# Altium PCB MiniPCB.PcbDoc (part 2 of 2)
Units mil, origin at the board's own origin, x right, y up, seen from the top; angles counter-clockwise.
Board outline 669.97 x 951.03 mil, 4 copper layers (Top Layer, GND, PWR, Bottom Layer), stack 30.2 mil thick; 100 components, 54 nets, 382 pads, 151 vias.
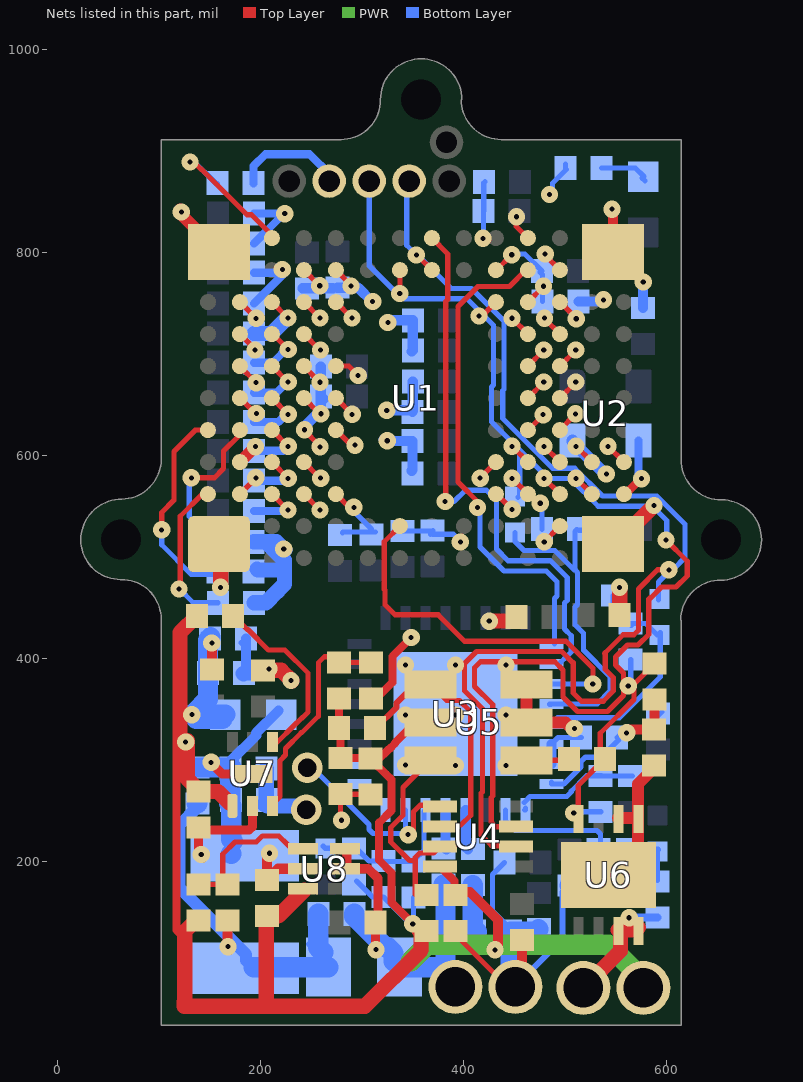
[diagram p4: the nets of this part, all layers, seen from the top]

## Via types
v1: diameter 17, hole 5, Top Layer to GND, tented both sides, 41 vias
v2: diameter 17, hole 5, Top Layer to Bottom Layer, tented both sides, 39 vias
v3: diameter 17, hole 5, GND to Bottom Layer, tented bottom, 18 vias
v4: diameter 17, hole 5, Top Layer to GND, tented top, 16 vias
v5: diameter 17, hole 5, GND to Bottom Layer, 11 vias
v6: diameter 17, hole 5, Top Layer to Bottom Layer, tented top, 8 vias
v7: diameter 17, hole 5, PWR to Bottom Layer, tented bottom, 7 vias
v8: diameter 17, hole 5, Top Layer to PWR, 4 vias
v9: diameter 17, hole 5, Top Layer to GND, 3 vias
v10: diameter 17, hole 5, Top Layer to PWR, tented top, 3 vias
v11: diameter 17, hole 5, PWR to Bottom Layer, 1 vias

## Nets (pads, with @x,y where several pads share a name; then routed paths per layer and width w, separated by ;. In a path a pad name is that pad's centre, name@x,y a point inside that pad or via, vN(x,y) a via of type N, cw(c..) or ccw(c..) an arc to the next point about the centre after c; other vN are vias at no path point) (continued)
GND: C1.0 C2.0 C3.0 C4.0 C5.0 C6.0 C7.0 C8.0 C9.0 C10.0 C11.0 C12.0 C13.1 C14.1 C15.1 C16.1 C17.1 C18.1 C19.0 C20.1 C21.1 C22.1 C23.1 C24.1 C25.1 C26.1 C27.1 C28.1 C29.1 C30.1 C31.1 C32.1 C35.1 C36.1 C37.1 C38.0 C39.1 C40.1 C41.1 C42.1 C43.1 C44.1 C45.1 C46.1 C47.0 C48.0 C49.1 C50.1 C51.0 C52.0 C53.0 C54.0 C55.0 C56.1 C57.1 C58.1 C59.1 C60.1 C61.1 C62.0 C63.1 C64.1 J1.1 pad.1@267.72,870.08 pad.3@245.28,251.4 R2.1 R5.0 R11.0 R12.0 R16.1 U1.1-A1 U1.9-A11 U1.10-B3 U1.11-B4 U1.13-B6 U1.14-B7 U1.15-B8 U1.16-B9 U1.19-C3 U1.20-C4 U1.21-C5 U1.22-C6 U1.23-C7 U1.24-C8 U1.25-C9 U1.30-D3 U1.31-D4 U1.32-D5 U1.33-D6 U1.34-D7 U1.35-D8 U1.36-D9 U1.37-D10 U1.41-E3 U1.43-E5 U1.44-E6 U1.45-E7 U1.47-E9 U1.48-E10 U1.68-K3 U1.69-K4 U1.74-K9 U1.79-L3 U1.80-L4 U1.81-L5 U1.82-L6 U1.83-L7 U1.84-L8 U1.85-L9 U1.87-L11 U1.89-M2 U1.90-M3 U1.91-M4 U1.92-M5 U1.93-M6 U1.94-M7 U1.95-M8 U1.96-M9 U1.97-M10 U1.99-N3 U1.100-N4 U1.106-P1 U1.108-P4 U1.114-P11 U2.2 U3.6 U3.7 U3.33 U4.5 U5.2 U5.3 U7.2 U7.7 U8.2 U8.3 U8.5 | length 4390.7
  Top Layer w5.12: U1.10-B3@179.89,562.01 194.88,577.01 v1@194.88,579.18 ; U1.13-B6@179.89,656.5 195.13,641.26 v1(196.06,641.26) ; U1.14-B7@179.89,687.99 179.89,687.65 v1(195.89,671.65) ; U1.15-B8@179.89,719.49 194.71,704.68 v1(194.71,703.94) ; U1.16-B9@179.89,750.99 v1(195.86,735.02) ; U1.19-C3@211.38,562.01 226.94,546.46 v6(227.16,546.46) ; U1.20-C4@211.38,593.51 v6(227.35,577.54) ; U1.21-C5@211.38,625 v6(227.35,609.03) ; U1.22-C6@211.38,656.5 v6(227.35,640.53) ; U1.24-C8@211.38,719.49 212.22,719.49 v6(227.39,704.33) ; U1.25-C9@211.38,750.99 v6@226.94,735.43 ; U1.23-C7@212.01,687.99 U1.23-C7@211.38,687.99 226.93,672.44 v6(227.39,672.44) ; U1.30-D3@242.88,562.01 v1@258.44,546.46 ; U1.31-D4@242.88,593.51 257.38,579.02 v1@257.38,577.59 ; U1.32-D5@242.88,625 258.44,609.45 v1@258.66,609.45 ; U1.33-D6@242.88,656.5 257.35,642.04 v1@258.81,642.04 ; U1.34-D7@242.88,687.99 242.88,687.83 v1@257.87,672.83 ; U1.35-D8@242.88,719.49 v1@258.44,703.94 ; U1.36-D9@242.88,750.99 v4@258.44,735.44 ; U1.37-D10@242.88,782.48 v1@258.44,766.93 ; U1.41-E3@274.37,562.01 v6@289.93,546.46 ; U1.43-E5@274.37,625 289.17,610.2 v1(293.18,610.2) ; U1.44-E6@274.37,656.5 v1(290.34,640.53) ; U1.47-E9@274.37,750.99 v1@289.93,735.44 ; U1.48-E10@274.37,782.48 v1@289.93,766.93 ; U1.45-E7@275,687.99 U1.45-E7@274.37,687.99 287.01,687.99 v4@298,677 ; C41.1@278.74,266.93 278.74,240.95 v4@279.83,239.86 ; C41.1@283.86,265.75 284.65,266.54 C40.1@308.27,266.54 ; v4(296.22,678.78) 301.99,678.78 v4@297.55,683.22 ; v1@416.29,577.96 U1.69-K4@431.85,593.51 ; v1@416.29,735.44 U1.74-K9@431.85,750.99 ; U1.68-K3@432.08,562.56 v4@447.64,547 ; v1@447.79,577.57 U1.79-L3@463.35,562.01 ; v1@447.79,609.07 U1.80-L4@463.35,593.51 ; v1@447.79,735.05 U1.84-L8@463.35,719.49 ; v1@451.92,835.35 451.92,825.42 U1.87-L11@463.35,813.98 ; U1.81-L5@462.8,624.44 v4@478.36,640 ; U1.82-L6@463.35,656.5 v1@478.91,672.06 ; U1.83-L7@463.35,687.99 v1@478.91,703.55 ; U1.85-L9@463.35,750.99 v1@478.91,766.55 ; v1@477.54,799 478.33,799 v1@480.35,796.99 ; v1@478.9,513.79 478.9,514.56 U1.89-M2@494.85,530.51 ; v1@479.29,577.57 U1.90-M3@494.85,562.01 ; v1@479.29,609.07 U1.91-M4@494.85,593.51 ; v1@479.29,798.04 v1@479.33,798 ; v1@479.8,736.98 479.8,734.54 U1.95-M8@494.85,719.49 ; v1(480.3,798.33) v1@480.35,796.99 ; U1.92-M5@494.69,625.23 v1@510.25,640.79 ; U1.93-M6@494.85,656.5 v1@510.41,672.06 ; U1.94-M7@494.85,687.99 v1@510.41,703.55 ; U1.96-M9@494.85,750.99 511.54,734.31 v1@512.56,734.31 ; U1.97-M10@494.85,782.48 v1@480.35,796.99 ; v1@510.78,577.57 U1.99-N3@526.34,562.01 ; v1@510.78,609.07 U1.100-N4@526.34,593.51 ; v1@542.28,609.07 U1.108-P4@557.84,593.51
  Top Layer w5.18: v4(345.43,226.77) 350.66,232 350.66,249.3 357.1,255.74 U4.5@374.98,255.74 ; C39.1@392.13,131.89 392.13,128.32 443.05,77.4 J1.1@450.42,77.4
  Top Layer w6: v6@226.94,735.43 v6(227.17,735.43)
  Top Layer w7.87: C42.1@311.42,358.27 329.92,376.77 329.92,402.36 v4(348.43,420.87)
  Top Layer w9: v4@142.29,203.22 138.98,206.53 138.98,231.5 188.98,231.5 192.13,234.65 U7.2@192.13,255.12 ; v4@150,298.82 162.2,286.61 U7.7@192.13,286.61 ; U8.2@283.46,193.31 306.26,193.31 315.75,183.82 C48.0@315.75,137.8 ; U8.3@283.46,212.99 285.04,211.42 U8.2@285.04,195.28 ; C42.1@308.66,357.87 309.06,358.27 C42.1@309.69,358.27 ; v4@312.9,110.7 313.39,111.19 C48.0@313.39,140.55
  Top Layer w10: C44.1@152.36,389.37 152.36,411.81 v4@152.76,412.2 ; C46.1@167.72,142.52 167.72,114.79 v4@169.11,113.39 ; C47.0@202.76,178.74 206.5,182.48 C47.0@206.69,182.28 C47.0@206.69,182.68 ; v4@209.13,209.65 206.69,207.21 C47.0@206.69,182.68 ; U8.5@242.13,193.31 217.32,193.31 C47.0@206.69,182.68 ; J1.1@448.46,79.36 457.4,88.3 C38.0@457.4,123.08 ; v9@545,844 547.01,841.99 U1.114-P11@547.01,800.2 ; v4@558.5,327 561.72,330.22 R12.0@587.5,330.22 ; R11.0@588,359.78 588,332.5 R12.0@590,330.5
  Top Layer w11.81: v1@120.95,842.07 120.95,838.47 U1.9-A11@159.22,800.2 ; U1.11-B4@179.89,593.34 U1.11-B4@179.89,593.51 194.99,608.61 v1@194.99,608.83 ; U5.2@461.02,337.4 461.81,338.19 U5.3@461.81,374.8 ; U5.2@461.81,337.4 500.27,337.4 v4@507.62,330.05
  Top Layer w15: U1.1-A1@159.22,512.8 161.02,511 v1@161.02,473.23 ; C45.1@202.52,388.55 220.58,388.55 v4@230.94,378.2 ; v9(425.3,437) 447,437 C6.0@453,443 ; C6.0@452.01,437.01 C6.0@454,439 ; U1.106-P1@547.01,512.8 549.42,512.8 v1@585.04,548.43 ; C5.0@553.72,443 553.72,470.22 v9@554,470.5
  Bottom Layer w5.12: C64.1@181.1,415.75 C64.1@183.86,412.99 ; C21.1@280.71,524.02 281.5,524.8 C20.1@312.99,524.8 ; v6@290.16,546.85 309.45,527.56 C20.1@309.45,524.8 ; C32.1@294.49,181.1 310.24,165.35 C31.1@321.26,165.35 345.61,141 v3@349,141 ; C23.1@340,525.72 369.72,525.72 C22.1@370,526 ; C30.1@350.79,164.96 350.79,141.21 v3@351,141 ; C22.1@367.32,522.44 C22.1@368.9,524.02 ; C22.1@370,522.44 390.16,522.44 v3@396.06,516.54 ; C18.1@420.08,840.55 C61.1@420.08,867.32 ; v3@420.5,812 419.68,812.82 C18.1@419.68,840.55 419.68,868.07 C61.1@421.12,869.5 ; U3.33@443,296 U3.33@444.39,297.39 ; v3@473.5,554.5 477.28,550.72 C37.1@477.28,527.5 ; v3@485.32,856.64 487.5,858.83 487.5,868 R16.1@501,881.5 ; U3.6@485.83,316.14 U3.6@486.61,316.14 ; U3.7@486,299 486.61,299.61 U3.7@486.61,300.69 ; U3.6@486.61,316.14 493,322.5 R5.0@515.78,322.5 ; R16.1@500.28,883 R16.1@500.28,886.69 ; v3@508.94,248.18 510.04,249.28 C35.1@535,249.28 ; C25.1@531.38,176.82 C25.1@531.78,177.22 ; C25.1@532.28,177.17 C25.1@533.12,177.17 ; v3@562.83,373.48 564.5,375.16 C36.1@564.5,399.28
  Bottom Layer w5.18: C28.1@440.27,199.45 428.46,187.63 428.46,151.72 R2.1@445.22,134.95 ; C25.1@533,177.28 533.12,177.17 C25.1@535.72,174.57
  Bottom Layer w6: J1.1@462.1,88.79 497.54,124.23 497.54,170.16 C29.1@504.2,176.82
  Bottom Layer w8: C4.0@193.31,867.72 193.31,884.81 205,896.5 248.5,896.5 pad.1@269,876 ; C51.0@193.7,545.28 225.54,545.28 v6@228.27,548.01 ; C7.0@193.7,575.2 225.13,575.2 v6@228.46,578.53 ; C9.0@193.7,604.72 222.57,604.72 v6@228.26,610.41 ; C53.0@193.7,633.07 217.67,633.07 v6@225.94,641.33 ; C55.0@193.7,661.81 215.89,661.81 v6@226.52,672.44 ; C11.0@193.7,691.34 212.15,691.34 v6@227.48,706.67 ; C10.0@193.7,749.61 v5@222.14,778.05 ; C52.0@193.7,779.92 221.53,779.92 v5@224.02,782.42 ; C8.0@193.7,808.66 221.04,836 v5@225,836 ; C12.0@193.7,838.19 222.81,838.19 v5@223,838 ; v5@222.14,782.42 v5@222.14,782.66 ; v3@561,146 561.72,145.28 C26.1@591,145.28
  Bottom Layer w10: C63.1@185.5,386.5 185.72,386.72 C64.1@185.72,420 ; C60.1@241.73,764.57 C17.1@271.65,764.57 ; v5@243.11,628.16 259.45,644.5 C58.1@259.45,657.87 ; C15.1@259.45,687.4 259.45,658.55 C58.1@262.5,655.5 ; C17.1@275.92,765.18 296.21,765.18 v5@309.87,751.52 ; v5@321.26,615.89 322.98,614.17 C13.1@349.8,614.17 349.8,585.8 C56.1@349,585 ; v5(324.4,644.5) 348.1,644.5 C57.1@349.72,642.87 ; v5@325.5,733 325.57,733.07 C16.1@350,733.07 350,703.5 C59.1@349,702.5 ; C57.1@350,644 C14.1@350,672.83 ; U3.33@444.2,296 444.66,296.46 U3.7@486.61,296.46 ; R2.1@450.4,126 R2.1@451,125.4 ; U3.7@486.61,299.61 486.61,299.49 U3.7@487.1,299 ; U3.6@486.61,316.14 486.61,300.69 U3.7@487.1,300.2 ; C19.0@512.99,751.57 537.47,751.57 v5@539.2,753.3 ; C62.0@576.77,745.28 576.77,772.79 v5@577.3,773.32
  Bottom Layer w11.81: U2.2@507.09,614.96 507.09,613.78 v3@538.98,581.89
  Bottom Layer w15: C63.1@183.07,385.43 C63.1@183.46,385.04 ; C63.1@183.86,385.83 204.83,385.83 v5@209,390 ; C3.0@193.43,515 205.49,515 ; C1.0@193.72,455 205.5,455 217,466.5 ; C54.0@193.7,720.08 211.16,720.08 v6@226.71,735.63 ; C2.0@196.6,488.27 197.52,487.35 223.79,487.35 223.79,473.38 205.53,455.12 ; C49.1@203.54,256.69 205.91,259.06 C50.1@205.91,291.73 ; C49.1@206.69,255.12 241.88,255.12 243,254 pad.3@245,254 ; 223.46,488.1 223.46,497.03 205.49,515 ; v5@224,507 v5(223,508) 216,515 205.49,515
  Bottom Layer w20: J1.1@449.69,85.33 446.59,88.43 R2.1@446.59,131.31 471.22,131.31 C27.1@473.76,133.85 ; C29.1@504.2,176.82 C25.1@531.38,176.82 ; C25.1@533,177.28 561.43,177.28 C24.1@561.98,177.84
  other v1: 160.76,470.28 479.4,515.03 258.66,546.46 587.54,550.69 195.56,577.99 259.38,577.75 416.29,577.73 447.57,577.57 479.07,577.57 510.56,577.57 195.23,608.66 258.77,608.51 447.57,609.07 479.07,609.07 510.56,609.07 542.06,609.07 259.51,641.08 510.25,641.01 258.62,672.09 478.91,672.29 510.41,672.29 259.26,703.75 478.91,703.78 510.41,703.78 290.15,735.44 447.58,735.08 479.73,735.15 510.92,734.63 415.16,737.22 258.46,767.06 289.29,766.93 478.74,766.57 452.2,834.96 122.26,839.78
  other v3: 350,139 563,145 508.44,248.1 342.91,295.28 392.13,294.88 441.73,294.88 342.91,344.49 392.13,344.49 441.73,344.49 562.11,373.33 342.91,393.7 392.13,393.7 441.73,393.7 396.85,514.96 475.5,553 540.55,581.89 419.15,813.74 484.5,856.81
  other v4: 313.72,113.63 168.16,116.62 141.79,207.23 208.97,208.53 279.83,240.98 151.57,298.03 560.5,327 509.03,331.28 230.11,378.64 152.25,415.49 447.86,547 478.36,640.23 258.66,735.44
  other v5: 208.5,390 324.88,614.52 243.54,625.37 325.5,731 310.5,751.5 537.8,753.2 576.89,770.67 221.67,783.13 224,838
  other v6: 292.04,549.01
  other v9: 553.56,470.28 546,842.5
HORISYNC: U1.86-L10 U3.1 | length 484.2
  Top Layer w5.12: v2@415.5,548 415.5,553 394.5,574 394.5,600.34 394.41,600.44 394.41,746.77 414.06,766.43 445.17,766.43 461.22,782.48 U1.86-L10@463.35,782.48
  Bottom Layer w5.12: v2(413.78,548.82) 415.36,548.82 416.14,548.03 416.14,509.84 439.69,486.3 481.35,486.3 491.91,475.74 491.91,461.66 489.37,459.12 U3.1@489.37,414.57
NetC1_1: C1.1 U1.2-A3 | length 149.7
  Top Layer w5.12: v2@121,471 121.15,471.15 121.15,540.27 142.9,562.01 U1.2-A3@148.39,562.01
  Bottom Layer w5.12: v2@120,469 134,455 C1.1@158.28,455
  other v2: 120.02,468.71
NetC2_1: C2.1 U1.4-A5 | length 203.9
  Top Layer w5.12: v2@103,526.8 103,544 115.06,556.06 115.06,604.06 136,625 U1.4-A5@148.39,625
  Bottom Layer w5.12: v2@103.8,526.2 102.9,525.3 102.9,512.1 132,483 C2.1@156,483
  other v2: 102.9,526.8
NetC3_1: C3.1 U1.12-B5 | length 152.7
  Top Layer w5.12: v2@133,578 133.08,578.08 154.78,578.08 163.83,587.12 163.83,604.3 179.89,620.37 U1.12-B5@179.89,625
  Bottom Layer w5.12: v2@130,576 130,540.22 155.22,515 C3.1@157.28,515
  other v2: 132.07,578
NetC4_1: C4.1 U1.27-C11 | length 148.5
  Top Layer w5.12: v2@131.47,891.88 141.56,881.79 142.21,881.79 187,837 191,837 191.18,837.01 211.38,816.8 U1.27-C11@211.38,813.98
  Bottom Layer w5.12: v2@132.89,891.11 156.28,867.72 C4.1@157.87,867.72
  other v2: 130.74,888.97
NetC19_1: C19.1 R1.0 U1.75-K10 | length 85.5
  Top Layer w5.12: U1.75-K10@432.09,782.32 v2@447.65,797.87
  Bottom Layer w5.12: v2@450.39,798.43 460.24,798.43 R1.0@477.17,781.5 ; R1.0@475.2,780.32 477.56,777.95 C19.1@477.56,751.57
  other v2: 447.42,797.59
NetC24_0: C24.0 C25.0 C26.0 L1.2 U3.10 | length 212.1
  Bottom Layer w5.12: U3.10@441.34,251.18 441.34,240.55 450.91,230.98 518.49,230.98 518.57,230.9 531.36,230.9 534.78,227.48 C25.0@534.78,214.86 ; C25.0@533.86,212.99 C24.0@560.63,212.99 ; C25.0@533.86,216.54 C25.0@533.86,217.46 ; C25.0@538.58,207.09 C25.0@539.76,208.27 ; C24.0@562.01,210.55 C24.0@562.01,212.66 591.34,212.66 L1.2@592,212 ; C26.0@591,182 L1.2@591,210.28
NetC30_0: C30.0 C31.0 C32.0 L2.1 U3.14 | length 152.4
  Bottom Layer w5.12: L2.1@261.81,215.35 263.78,213.39 L2.1@264.17,213.39 C32.0@292.13,213.39 ; C32.0@291.73,216.14 307.09,200.79 C31.0@320.47,200.79 ; C31.0@321.26,200.79 C31.0@320.47,200.79 ; C30.0@350.79,200.39 320.87,200.39 C31.0@320.47,200.79 ; C30.0@350.79,201.18 360.94,211.34 360.94,249.53 U3.14@362.6,251.18
NetC33_0: C33.0 U3.13 | length 39.3
  Bottom Layer w10: U3.13@382.28,251.18 382.28,212.99 C33.0@383.07,212.2
NetC33_1: C33.1 J1.0 L5.1 R17.0 | length 216.2
  Bottom Layer w20: R17.0@292.52,148.82 292.52,146.53 322.94,116.1 325.24,116.1 331.1,110.24 L5.1@331.1,102.36 ; L5.1@336.81,96.46 371.54,96.46 J1.0@382.24,85.76 ; C33.1@380.32,177.56 382.24,175.63 J1.0@382.24,85.76 ; J1.0@382.24,75.76 J1.0@382.24,85.76
NetC34_0: C34.0 U3.12 | length 40.5
  Bottom Layer w5.12: C34.0@401.18,218.11 C34.0@401.57,217.72
  Bottom Layer w10: U3.12@401.97,251.18 402.13,251.02 402.13,214.41 C34.0@404.33,212.2
NetC34_1: C34.1 R2.0 | length 51
  Bottom Layer w10: C34.1@406.55,174.66 C34.1@409.06,177.17
  Bottom Layer w20: C34.1@409.06,177.17 409.06,135.24 R2.0@412.98,131.31
NetC35_0: C35.0 R3.1 U3.9 | length 120.3
  Bottom Layer w5.12: U3.9@459.71,258.49 465.51,264.29 501.56,264.29 505.98,268.72 505.98,269.55 521.16,284.72 C35.0@535,284.72 535.78,284.72 536,284.5 R3.1@566,284.5 ; U3.9@460.24,251.18 U3.9@461.02,251.18 U3.9@461.02,252.96
NetC36_0: C36.0 L3.2 R6.0 U3.5 | length 239.5
  Bottom Layer w5.12: U3.5@485.83,335.83 U3.5@486.61,335.83 492.66,341.87 ; 493.5,342 492.79,342 492.66,341.87 ; R6.0@547,462.28 547,451 C36.0@565,433 ; C36.0@564.5,434.72 579.28,434.72 L3.2@590.5,423.5 ; L3.2@592.5,423 592.78,423.28 L3.2@593,423.28 ; 593.5,394.96 L3.2@593.5,425.5 ; 593.59,395.19 593.59,382.1 553.36,341.87 492.66,341.87
NetC37_0: C37.0 L4.2 R7.0 U3.4 | length 349.6
  Bottom Layer w5.12: L4.2@450.5,524.28 450.5,515.5 459.46,506.54 489.74,506.54 508.77,487.5 509.61,487.5 ; U3.4@484.65,355.12 U3.4@485.83,355.12 ; U3.4@486.61,355.51 531.53,355.51 544.17,368.15 544.17,382.24 518,408.42 518,425 509.61,433.39 509.61,450.74 512.14,453.27 512.14,484.96 509.61,487.5 ; 510,487.5 509.61,487.5 ; C37.0@511.5,527 509.61,525.11 509.61,487.5 ; C37.0@513.72,526.5 C37.0@517.46,526.5 ; C37.0@517.12,526.16 C37.0@517.46,526.5 ; R7.0@539.42,526.5 R7.0@542.5,526.5 ; R7.0@539.42,527.57 518.52,527.57 C37.0@517.46,526.5
NetC42_0: C42.0 R13.0 U7.3 | length 214.6
  Top Layer w5: U7.3@212.2,257.09 219.31,264.19 219.31,299.65 224.82,305.16 224.82,311.72 240.27,327.16 240.85,327.16 257.06,343.37 257.06,396.01 262.99,401.94 R13.0@279.12,401.94 ; R13.0@277.56,396.06 C42.0@309.84,396.06
NetC46_0: C46.0 R15.0 U8.4 | length 151.2
  Top Layer w5: R15.0@139.37,181.1 142.52,177.95 C46.0@167.72,177.95 ; C46.0@162.99,180.32 162.99,207.54 174.95,219.5 195.97,219.5 201.95,225.47 218.21,225.47 226.64,217.04 ; 224.8,218.9 230.71,212.99 U8.4@242.13,212.99
NetC49_0: C49.0 C50.0 L6.2 L7.1 R18.1 | length 191.7
  Bottom Layer w5.12: L7.1@209.06,341.34 L7.1@215.35,347.64
  Bottom Layer w10: C50.0@170.47,291.73 170.47,298.94 196,324.46 196,327 L7.1@218,349
  Bottom Layer w20: R18.1@138.19,292.91 170.08,292.91 C50.0@170.08,288.98 ; C49.0@169.29,257.48 170.47,258.66 C50.0@170.47,291.73 ; C49.0@171.26,255.12 171.26,222.05 L6.2@172.83,220.47
NetD1_C: D1.C R16.0 | length 49.2
  Bottom Layer w5.12: R16.0@535.72,883 569,883 D1.C@577.5,874.5 ; D1.C@575.75,873.25 D1.C@578.5,870.5
NetJ2_1: J2.1 U6.7 U6.8 | length 96.2
  Top Layer w15: J2.1@517.94,76 554.5,112.56 U6.7@554.5,133 ; U6.7@552.19,133 U6.7@554.5,133 ; U6.7@555,136 554.5,135.5 U6.7@554.5,133 ; U6.8@572,135.5 569.5,133 U6.7@554.5,133
NetL3_1: L3.1 pad.3@346.46,870.08 U1.60-H10 U4.2 | length 1183.7
  Top Layer w5.12: v2@354.89,797.84 354.89,796.45 U1.60-H10@368.86,782.48 ; U4.2@445.36,215.69 445.17,215.88 427.67,215.88 417.17,226.39 417.17,267.56 418.54,268.94 418.54,350.75 400.79,368.5 400.79,395.28 412.6,407.09 496.71,407.09 507.87,395.93 507.87,366.54 516.22,358.19 537.44,358.19 547.38,368.12 547.38,381.62 539.5,389.5 539.5,405.5 ; 539,405 539.5,405.5 ; v2(602,487.5) 591,487.5 572.1,468.6 572.1,428.06 567.59,423.54 557.23,423.54 539.5,405.81 539.5,405.5
  Bottom Layer w5.12: pad.3@344,875 344,806.93 v2(353.51,797.41) ; v2@353.1,799.06 353.3,799.06 387.91,764.45 407.73,764.45 439.72,732.46 439.72,665.14 438.54,663.96 438.54,636.5 487.54,587.5 509.5,587.5 536.84,560.16 590.15,560.16 618,532.31 618,499.5 v2@606.5,488 ; L3.1@592,458 592,475.46 603,486.46 v2(602,487.5)
NetL4_1: L4.1 pad.2 U1.56-G10 U4.3 | length 1212.3
  Top Layer w5.12: v2@337.37,759.46 U1.56-G10@337.37,782.48 ; U4.3@451.57,234.65 431.85,234.65 427.28,239.21 427.28,263.37 428.66,264.75 428.66,354.94 410.91,372.69 410.91,391.08 416.79,396.97 489.71,396.97 497.76,388.92 497.76,362.34 512.03,348.07 541.64,348.07 557.5,363.93 557.5,385.81 549.62,393.69 549.62,401.62 561.43,413.43 571.78,413.43 582.22,423.87 582.22,458.48 583.74,460 584.45,460 594.95,470.5 609.04,470.49 620.11,481.55 620.16,481.55 620.16,495.98 v2(599.21,516.93)
  Bottom Layer w5.12: pad.2@307.09,870.08 307.09,786.91 v2@335,759 ; v2@335.87,760.51 342.05,754.33 403.54,754.33 429.61,728.27 429.61,669.33 427.56,667.29 427.56,633.18 456.37,604.37 ; L4.1@453.5,559 455.25,560.75 455.25,603.25 456.37,604.37 ; v2@600,518 600,536 585.96,550.04 532.65,550.04 505.31,577.38 483.35,577.38 456.37,604.37
  other v2: 337.23,759.46
NetL5_2: L5.2 L6.1 R17.1 R18.0 | length 322.4
  Bottom Layer w5.12: L5.2@247.44,119.09 L5.2@260.24,106.3
  Bottom Layer w8: R18.0@137.48,257.48 R18.0@138,258
  Bottom Layer w12: R18.0@138.19,257.48 138.19,254.14 120.1,236.05 120.1,174.75 186,108.86 L6.1@186,103
  Bottom Layer w20: R18.0@137.48,257.48 R18.0@138.19,257.48 ; L6.1@193.31,96.46 L5.2@267.13,96.46 ; R17.1@257.09,148.82 257.09,115.75 L5.2@261.81,111.02
NetR4_0: R4.0 R5.1 U3.8 | length 143.6
  Bottom Layer w5.12: U3.8@486.61,278.59 U3.8@486.61,276.77 498.9,276.77 515.63,293.5 515.63,298.67 520.06,303.1 535.6,303.1 R5.1@553.11,320.61 ; R5.1@551.22,322.5 557.89,329.17 576.67,329.17 R4.0@595,347.5
NetR8_0: R8.0 U4.6 U5.4 | length 253.4
  Top Layer w5.12: U5.4@379.98,374.8 U5.4@367.32,374.8 383.39,358.74 396.04,358.74 407.05,347.74 407.05,246 397.54,236.49 ; U4.6@384.65,235.43 395.63,235.43
  Top Layer w5.91: R8.0@312.6,331.89 313.81,331.89 333.78,351.86 333.78,356.13 353.63,375.98 U5.4@355.51,375.98
NetR9_0: R9.0 U4.7 U5.6 | length 220.4
  Top Layer w5.12: 328.42,231.44 328.42,233.81 ; U5.6@344.65,293.27 U5.6@349.7,298.33 ; R9.0@352.43,167.86 352.43,201.5 ; U5.6@353.39,299.3 353.39,295.13 U5.6@362.99,304.72 ; U5.6@367.32,300 340.51,273.19 340.51,245.9 328.42,233.81 ; U4.7@376.77,214.96 370.55,208.74 356.91,208.74 352.43,204.26 352.43,201.5 ; 328.42,233.81 328.42,219.73 346.65,201.5 352.43,201.5
NetR10_0: R10.0 U5.1 | length 40.9
  Top Layer w5.12: U5.1@461.81,300 501.57,300 R10.0@502.36,300.79
NetR10_1: R10.1 R11.1 U6.4 | length 189.4
  Top Layer w5.12: U6.4@512.82,243.24 512.82,275.32 537.25,299.75 R10.1@543.83,299.75 ; R10.1@535.61,301.62 534.5,302.73 534.5,326.63 567.61,359.74 567.61,374.83 R11.1@588,395.22
NetR12_1: R12.1 U6.1 U6.2 U6.9 | length 134.2
  Top Layer w11.81: U6.9@542.34,188.12 U6.9@548.33,194.1 ; U6.2@552.19,243.24 U6.1@571.87,243.24 ; U6.9@566.5,201.5 571.87,206.87 U6.1@571.87,243.24 ; R12.1@592,297 571.87,276.87 U6.1@571.87,243.24
NetR14_0: R14.0 U7.4 | length 179
  Top Layer w5: R14.0@177.17,438.58 186.99,428.76 187.73,428.76 207.83,408.66 224.06,408.66 247.06,385.66 247.06,347.52 241.4,341.85 ; U7.4@209.45,318.11 U7.4@211.81,318.11 ; U7.4@213.8,314.84 236.12,337.16 236.37,337.16 241.23,342.02
NetU1_107-P3: U1.107-P3 U2.3 | length 62.6
  Top Layer w7.87: U1.107-P3@557.84,562.01 559.26,562.01 v2@575.59,578.35
  Bottom Layer w7.87: U2.3@572.05,614.96 572.05,581.89 v2@575.59,578.35
  other v2: 575.2,577.17
NetU3_15: pad.3@246.16,292.75 U3.15 | length 143.7
  Bottom Layer w5.12: pad.3@252,292 307.07,236.93 307.07,231.77 310.93,227.91 342.91,227.91 U3.15@342.91,251.18
NetU3_16: U3.16
NetU3_17: U3.17
NetU3_18: U3.18
PIXCLK: U1.56-G2 U3.3 | length 370.9
  Top Layer w5.12: U1.56-G2@337.21,530.51 U1.56-G2@337.37,530.51 321.94,515.08 321.94,468.02 322.68,467.28 322.68,453.12 332.54,443.26 374.99,443.26 401.04,417.2 500.91,417.2 527.48,390.63 527.48,380 v2@528.35,379.13
  Bottom Layer w5.12: U3.3@485.83,375.2 U3.3@486.61,375.2 v2(527.17,375.2) v2@529.92,375.2
V5P0: C39.0 C40.0 C41.0 C43.0 C47.1 C63.0 C64.0 J2.0 L7.2 R8.1 R9.1 R13.1 R14.1 R15.1 U4.8 U5.5 U7.1 U8.6 | length 1812
  Top Layer w7.87: R8.1@277.17,329.53 278.74,327.95 C41.0@278.74,302.36 C40.0@311.81,302.36 ; R8.1@277.17,331.89 R13.1@277.17,361.02 ; C40.0@311.42,298.43 323.54,286.3 323.78,286.3 329.02,281.06 329.02,250.67 316.93,238.58 316.93,201.64 329.18,189.38 329.18,160.03 359.46,129.75 R9.1@364.87,129.75 ; C40.0@314.57,299.21 326.5,311.14 327.13,311.14 332.36,316.38 332.36,317.05 352.72,337.4 U5.5@367.32,337.4 ; R9.1@358,130.71 353.4,130.71 358,126.11 R9.1@359.03,125.08 ; U4.8@376.77,195.28 390.94,181.1 C39.0@390.94,170.47
  Top Layer w8: 121,129.5 117.5,133 117.5,321.5 121,325 ; 358,113 358.94,112.06
  Top Layer w9.84: C39.0@394.09,170.47 406.3,170.47 433.94,142.83 v8@433.94,113.49
  Top Layer w10: 123.5,124 125.59,124
  Top Layer w15: v8@124.5,319.5 121,323 121,325 121,425.72 R14.1@137.4,442.13 ; 125.59,123 125.59,62.59 125,62 125,58 303,58 358,113 R9.1@358,126.11 ; 125.59,124 125.59,131.5 R15.1@138.58,144.49 ; v8@128,319.5 128,282 C43.0@140.71,269.29 ; C43.0@138.98,269.29 C43.0@140.71,269.29 ; C43.0@141,269 C43.0@140.71,269.29 ; U7.1@169.49,258.07 158.27,269.29 C43.0@140.71,269.29 ; C47.1@205.51,148.82 205.91,148.43 205.91,60.09 207,59 ; C47.1@206.69,149.61 C47.1@206.69,146.85 217.72,146.85 U8.6@243.31,172.44 ; R9.1@361.14,134.14 R9.1@362,135 ; R9.1@362.4,132.87 R9.1@364.17,134.65
  PWR w20: 348,102 364.5,118.5 542.5,118.5 J2.0@580,81
  Bottom Layer w5.12: C63.0@150,385.83 C63.0@153.6,382.22
  Bottom Layer w20: v11(132.6,344.9) 136.77,340.73 L7.2@162.74,340.73 ; v11@134.74,346.43 148.43,360.12 C63.0@148.43,385.83 148.43,418.43 C64.0@151,421 ; v11@141,345 L7.2@165.5,345
  other v8: 431.05,113.49 126.5,318
VERTSYNC: U1.61-H11 U3.2 | length 549.3
  Top Layer w5.12: U1.61-H11@373.42,813.98 U1.61-H11@368.86,813.98 384.5,798.35 384.5,753.5 382.5,751.5 382.5,560.5 v2@379,557
  Bottom Layer w5.12: v2(381.89,554.72) 390.65,554.72 401.75,565.83 422.36,565.83 432.28,555.91 432.28,508.01 443.88,496.42 485.54,496.42 502.03,479.94 502.03,457.46 499.49,454.93 499.49,429.12 505.98,422.62 505.98,407.48 ; U3.2@495.67,396.46 501.3,402.09 501.56,402.09 505.98,406.51
pads on no net: U1.17-C1 U1.18-C2 U1.26-C10 U1.49-E11 U1.53-F10 U1.55-G1 U1.65-J11 U1.76-K11 U1.77-L1 U1.78-L2 U1.101-N5 U1.102-N6 U1.103-N7 U1.104-N8 U1.105-N9 U1.109-P5 U1.110-P6 U1.111-P7 U1.112-P8 U1.113-P9 U6.3 U6.5 U6.6

## Polygon pours and split planes (outlines as drawn)
GND on GND "GND" (solid, remove dead copper, pour order 108): 303,906 328,931 393,931 418,906 598,906 609,895 609,574 630,553 630,480 609,459 609,44 108,44 108,457 85,480 85,555 107,577 107,906
"1.8V VDD" on PWR "1.8V" (solid, remove dead copper, pour order 110): 325,925 397,925 397,847 390,840 325,840
"1.8V VDD" on PWR "1.8V" (solid, remove dead copper, pour order 68): 152.69,118 152.69,329.37 257.69,329.37 257.69,469.37 367.69,469.37 367.69,529.37 437.69,529.37 437.69,814.37 501.69,814.37 502.69,813.37 502.69,874.37 427.69,874.37 427.69,883.37 337,888.59 337,899.91 337,908 337,924.37 396.69,924.37 415.69,905.37 595.69,905.37 606.69,894.37 606.69,574.37 627.69,553.37 627.69,479.37 606.69,458.37 606.69,139 347.69,139 347.69,118
V5P0 on PWR "5V" (solid, pour order 28): 360,113 360,50 148,50 148,113
"1.2V VDD" on PWR "1.2V" (solid, remove dead copper, pour order 60): 163.39,480.36 163.39,395.36 253.39,395.36 253.39,475.36 363.39,475.36 363.39,530.36 368.39,535.36 433.39,535.36 434.39,536.36 434.39,818.36 498.39,818.36 501.39,821.36 501.39,870.36 424.39,870.36 424.39,877.19 375.19,877.19 368.39,877.19 248.39,877.19 248.39,850.36 203.39,850.36 203.39,480.36
"2.9V VDD" on PWR "2.9V" (solid, remove dead copper, pour order 56): 158.52,363.6 109.52,363.6 109.52,458.6 86.52,481.6 86.52,553.6 108.52,575.6 108.52,903.6 235,903.6 235,853.6 199.52,853.6 200.52,852.6 200.52,483.6 158.52,483.6
"2.9V VDD" on PWR "2.9V" (solid, pour order 38): 255.59,334.5 155.59,334.5 155.59,390.5 255.59,390.5
V5P0 on PWR "5V" (solid, pour order 26): 152,360.02 152,46.02 110,46.02 110,360.02

## Keep-outs
Keep-Out Layer:
  lines w1: 191,906 303,906 360.5,963.5 418,906 598,906 609,895 609,593 609,574 630,553 630,480 609,459 609,44 108,44 108,457 85,480 85,555 102,572 107,577 107,906 195,906

## Silkscreen, mask and mechanical layers (free items; w line width, h text height)
Top Overlay:
  circle w10: c601,898 r4.24
  circle w10: c120,70 r4.47
  circle w10: c452,181 r3.89
  circle w10: c464.8,275.4 r5.56
  circle w10: c591.7,263.9 r3.49
  circle w10: c101.6,507.3 r5.86
  lines w3: 127.6,245.5 127.6,257.5 ; 127.9,154.6 127.9,166.6 ; 141.4,366.4 141.4,378.4 ; 149.6,154.3 149.6,166.3 ; 149.8,430.7 161.8,430.7 ; 149.9,453.4 161.9,453.4 ; 150.6,245 150.6,257 ; 156.7,154.3 156.7,166.3 ; 163.4,366.4 163.4,378.4 ; 178.2,154.3 178.2,166.3 ; 191.5,364.8 191.5,376.8 ; 195.6,158.9 195.6,170.9 ; 214.8,365.6 214.8,377.6 ; 217.8,158.7 217.8,170.7 ; 266.4,372.9 266.4,384.9 ; 268.1,278.9 268.1,290.9 ; 287.9,373.4 287.9,385.4 ; 289,129.9 301,129.9 ; 289.5,321.1 301.5,321.1 ; 289.5,343.7 301.5,343.7 ; 289.6,278.9 289.6,290.9 ; 289.8,151.3 301.8,151.3 ; 297.7,278.9 297.7,290.9 ; 298.2,372.4 298.2,384.4 ; 319.5,278.7 319.5,290.7 ; 320.4,373.1 320.4,385.1 ; 352.2,144.7 352.2,156.7 ; 354.4,55.2 365.5,55.2 ; 360.4,47.8 360.4,62.7 ; 374.8,144.2 374.8,156.2 ; 381.1,144.4 381.1,156.4 ; 403.4,144.7 403.4,156.7 ; 445.8,135.2 445.8,147.2 ; 464,451.5 476,451.5 ; 464.2,429.7 476.2,429.7 ; 467.4,51.8 478,51.8 ; 469,135.6 469,147.6 ; 484.9,43 484.9,101.6 486,102.7 610.4,102.7 610.6,102.5 610.6,42.9 610.8,42.7 ; 490.2,51.2 500.8,51.2 ; 513.8,312.8 525.8,312.8 ; 514.3,289.7 526.3,289.7 ; 529.8,432.4 541.8,432.4 ; 530.3,454.4 542.3,454.4 ; 576.9,306.7 576.9,318.7 ; 577.2,371.8 577.2,383.8 ; 595.5,53.2 606.6,53.2 ; 598.7,307 598.7,319 ; 599.5,371.8 599.5,383.8 ; 601.5,45.8 601.5,60.7
  text "1.8V" at 333.05,913.6 h9.45
  text "SDA" at 333.74,893.01 h9.45
  text "2.9V" at 211.75,891.86 h9.45
  text "GND" at 256.16,892.43 h9.45
  text "SCL" at 294.81,892.43 h9.45
  text "1.2V" at 413,873 h9.45
  text "KEMERE LAB-IMR0-1/18" at 114.1,48.3 h9.45
  text "LED" at 534,45 h9.45
  text "DATA" at 404.3,43 h9.45
Bottom Overlay:
  lines w3: 126.5,270 126.5,282 ; 150,268.5 150,280.5 ; 160,397 172,397 ; 160.5,374.5 172.5,374.5 ; 162.5,409 174.5,409 ; 162.5,431.5 174.5,431.5 ; 169,564 181,564 ; 169.5,474.5 181.5,474.5 ; 169.5,504 181.5,504 ; 169.5,534 181.5,534 ; 169.5,556.5 181.5,556.5 ; 169.5,616 181.5,616 ; 169.5,644.5 181.5,644.5 ; 169.5,797 181.5,797 ; 170,443.5 182,443.5 ; 170,466 182,466 ; 170,497 182,497 ; 170,526.5 182,526.5 ; 170,586.5 182,586.5 ; 170,621.5 182,621.5 ; 170,650 182,650 ; 170,673 182,673 ; 170,680 182,680 ; 170,702.5 182,702.5 ; 170,738.5 182,738.5 ; 170,760.5 182,760.5 ; 170,768 182,768 ; 170,849.5 182,849.5 ; 170,856.5 182,856.5 ; 170,879.5 182,879.5 ; 170.5,593.5 182.5,593.5 ; 170.5,791.5 182.5,791.5 ; 170.5,820.5 182.5,820.5 ; 170.5,827 182.5,827 ; 182,302.5 194,302.5 ; 182.5,272.5 194.5,272.5 ; 182.5,280.5 194.5,280.5 ; 183,249 195,249 ; 230.5,776 230.5,788 ; 253,776 253,788 ; 254,190 254,202 ; 260.5,776 260.5,788 ; 267,497.5 267,509.5 ; 268.5,137 280.5,137 ; 269.5,160.5 281.5,160.5 ; 270,669.5 282,669.5 ; 271.5,699 283.5,699 ; 272,646 284,646 ; 272,675.5 284,675.5 ; 274.5,190.5 274.5,202.5 ; 280.5,190 280.5,202 ; 284,777 284,789 ; 290.5,67.5 314,67.5 ; 290.5,498 290.5,510 ; 292,124.5 315.5,124.5 ; 298,498 298,510 ; 304.5,190 304.5,202 ; 309.5,176.5 309.5,188.5 ; 322,498 322,510 ; 328.5,498 328.5,510 ; 333.5,177 333.5,189 ; 339,176.5 339,188.5 ; 351.5,498.5 351.5,510.5 ; 355.2,55.7 366.3,55.7 ; 357,498.5 357,510.5 ; 360.5,594.5 372.5,594.5 ; 361,571 373,571 ; 361,744.5 373,744.5 ; 361.2,48.3 361.2,63.2 ; 361.5,625 373.5,625 ; 362,631 374,631 ; 362,654.5 374,654.5 ; 362,691.5 374,691.5 ; 362.5,176.5 362.5,188.5 ; 362.5,602.5 374.5,602.5 ; 362.5,661 374.5,661 ; 362.5,684 374.5,684 ; 362.5,722 374.5,722 ; 363,714.5 375,714.5 ; 369,189.5 369,201.5 ; 380.5,498.5 380.5,510.5 ; 392.5,189 392.5,201 ; 397.5,189 397.5,201 ; 420.5,189.5 420.5,201.5 ; 422.47,142.59 434.47,142.59 ; 422.94,120.15 434.94,120.15 ; 431,829 443,829 ; 431,856.5 443,856.5 ; 432,879 444,879 ; 432.5,851.5 444.5,851.5 ; 441,535.5 441,547.5 ; 451,187 464,187 ; 452,212 464,212 ; 460,536.5 460,548.5 ; 462.5,146.5 462.5,158.5 ; 468.2,51.4 478.8,51.4 ; 485.2,42.6 485.2,102.4 485.8,102.4 486.1,102.7 610.6,102.7 610.6,42.6 ; 486.5,146.5 486.5,158.5 ; 487.5,188.5 487.5,200.5 ; 489,516 501,516 ; 489,539 501,539 ; 489,770 501,770 ; 489.5,740 501.5,740 ; 489.5,762.5 501.5,762.5 ; 489.5,793 501.5,793 ; 490.1,51.5 500.7,51.5 ; 492.5,189 492.5,201 ; 511.5,894 523.5,894 ; 513,871.5 525,871.5 ; 515,189 515,201 ; 522,188.5 522,200.5 ; 523.5,261 523.5,273 ; 526.5,311.5 538.5,311.5 ; 528.5,334 540.5,334 ; 536,473.5 536,485.5 ; 544.5,188.5 544.5,200.5 ; 547,260.5 547,272.5 ; 549.5,188.5 549.5,200.5 ; 550,516.5 562,516.5 ; 550.5,539 562.5,539 ; 553,261 553,273 ; 554,411 554,423 ; 559,473.5 559,485.5 ; 565.5,722 565.5,734 ; 571.5,188.5 571.5,200.5 ; 576,260.5 576,272.5 ; 576,411.5 576,423.5 ; 579.5,157.5 579.5,169.5 ; 580.5,323 580.5,335 ; 581.5,222.5 581.5,234.5 ; 583.5,435.5 583.5,447.5 ; 587.5,722 587.5,734 ; 595.3,53.4 606.4,53.4 ; 600.5,221.5 600.5,233.5 ; 601.3,46 601.3,60.9 ; 602.5,157.5 602.5,169.5 ; 603,323.5 603,335.5 ; 603,435 603,447
  text "1.8V" at 365.22,914.11 h9.45
  text "2.9V" at 243.44,892.41 h9.45
  text "GND" at 280.26,892.07 h9.45
  text "SCL" at 317.93,891.89 h9.45
  text "SDA" at 359.04,891.21 h9.45
  text "1.2V" at 400.5,835.47 h9.45
  text "KEMERE LAB-IMR0-1/18" at 293.9,47.4 h9.45
  text "LED" at 559.2,45 h9.45
  text "DATA" at 438.8,42.5 h9.45
M1 Board Outline:
  lines w0: 63.5,557.03 ccw(c62.93,596.46) 102.36,596.46 ; 63.67,557.03 63.33,557.03 ccw(c63.33,516.98) 23.28,516.98 ccw(c62.32,516.98) 62.32,477.95 63.33,477.95 cw(c63.33,438.92) 102.36,438.92 ; 102.36,261.41 102.36,438.58 ; 102.36,596.4 102.36,911.02 279.53,911.02 ccw(c279.53,949.71) 318.21,949.71 318.21,950.39 cw(c358.27,950.39) 358.27,990.45 cw(c358.27,950.4) 398.32,950.4 ; 397.64,950.39 ccw(c437.01,950.39) 437.01,911.02 ; 398.32,949.71 398.32,950.39 ; 614.17,261.41 614.17,437.42 ccw(c613.01,437.42) 613.84,438.24 cw(c652.86,438.24) 652.86,477.27 653.2,477.27 ccw(c653.2,517.32) 693.25,517.32 ccw(c654.22,517.32) 654.22,556.35 653.54,556.35 cw(c653.54,595.72) 614.17,595.72 614.17,911.02 437.01,911.02 ; 398.32,950.39 398.32,950.4 ; 437.01,911.02 ccw(c437.01,911.02) 437.01,911.02 ; 437.01,911.02 ccw(c437.01,911.02) 437.01,911.02 ; 437.01,911.02 437.01,911.02 ; 437.01,911.02 437.01,911.02
  lines w0.39: 102.36,261.42 102.36,39.24 585.57,39.24 585.74,39.41 614.17,39.41 614.17,261.42
M5 Assembly Top:
  text "C5" at 519.3,433.4 h20
  text "C6" at 455.5,431.6 h20
  text "R14" at 130.5,431.2 h20
  text "R11" at 598.3,356.3 h20 r90
  text "C42" at 318.1,353.1 h20 r90
  text "R13" at 287.6,351.8 h20 r90
  text "C44" at 164.3,345.2 h20 r90
  text "C45" at 218.4,345.2 h20 r90
  text "R8" at 281.5,321.3 h20
  text "PIN 1" at 441.3,297.7 h10
  text "R10" at 495.5,291.9 h20
  text "R12" at 597.2,286.1 h20 r90
  text "C41" at 289.9,261 h20 r90
  text "C40" at 317.5,258.6 h20 r90
  text "C43" at 148.9,223.8 h20 r90
  text "PIN 1" at 577.4,221.9 h10 r90
  text "PIN 1" at 433.2,191.2 h10
  text "R15" at 147.6,137.8 h20 r90
  text "C47" at 217.3,137 h20 r90
  text "C46" at 177.5,134.6 h20 r90
  text "R9" at 372.5,134.4 h20 r90
  text "C48" at 269.2,130.4 h20
  text "C39" at 403.2,124.1 h20 r90
  text "C38" at 465.9,113.2 h20 r90
M6 Assembly Bottom:
  text "R16" at 492.7,873.6 h20
  text "C4" at 157,858 h20
  text "C61" at 414.7,857.4 h20
  text "D1" at 584.4,835.8 h20 r90
  text "C18" at 414.5,830.2 h20
  text "C12" at 151,828 h20
  text "C8" at 161,799 h20
  text "C52" at 153,771 h20
  text "R1" at 481.1,770.8 h20
  text "C17" at 281.5,759 h20 r90
  text "C60" at 251.5,756 h20 r90
  text "C19" at 471.6,740.7 h20
  text "C10" at 151,740 h20
  text "C16" at 343.5,723.5 h20
  text "C54" at 149,709 h20
  text "C62" at 585.6,699.8 h20 r90
  text "C59" at 343,693.5 h20
  text "C11" at 151,682 h20
  text "C15" at 251,677.5 h20
  text "C14" at 344.5,662.5 h20
  text "C55" at 148,653 h20
  text "C58" at 251.5,647.5 h20
  text "C57" at 341.5,632.5 h20
  text "U2" at 550,627.3 h20 r90
  text "C53" at 151,623 h20
  text "C13" at 341.5,603 h20
  text "C9" at 159,595 h20
  text "C56" at 343.5,573 h20
  text "C7" at 159,566 h20
  text "C51" at 154,535 h20
  text "L4" at 459.6,529.5 h20 r90
  text "C37" at 468.2,516.5 h20
  text "R7" at 541.2,515.8 h20
  text "C3" at 158,505 h20
  text "C21" at 287.5,481 h20 r90
  text "C22" at 378.1,481.4 h20 r90
  text "C20" at 319,478 h20 r90
  text "C23" at 348.5,478 h20 r90
  text "C2" at 158,476 h20
  text "R6" at 556.5,464.3 h20 r90
  text "C1" at 160,446 h20
  text "L3" at 603.6,427.5 h20 r90
  text "C64" at 143,410.5 h20
  text "C36" at 573.8,390.2 h20 r90
  text "C63" at 140,376.5 h20
  text "L7" at 175.5,334.5 h20
  text "R4" at 600,317.4 h20 r90
  text "R5" at 519.7,311 h20
  text "C50" at 162.5,281.5 h20
  text "R3" at 573.8,251.9 h20 r90
  text "R18" at 148.5,250.5 h20 r90
  text "C49" at 163,245.5 h20
  text "C35" at 543.7,241.4 h20 r90
  text "L2" at 275,181.7 h20 r90
  text "C32" at 303.7,169.4 h20 r90
  text "C27" at 485,168.9 h20 r90
  text "C34" at 419.2,168.5 h20 r90
  text "C29" at 514.5,167.6 h20 r90
  text "C25" at 543,168.2 h20 r90
  text "C24" at 569.7,168.5 h20 r90
  text "C33" at 390.7,167.2 h20 r90
  text "C28" at 456.2,166.4 h20 r90
  text "C30" at 360.6,158.6 h20 r90
  text "C31" at 332.1,158.3 h20 r90
  text "C17" at 249.5,138 h20
  text "L1" at 523.9,138.3 h20
  text "L6" at 188,136.5 h20 r90
  text "R2" at 413.33,121.27 h20
  text "C26" at 544.4,109.7 h20
  text "L5" at 286,92 h20
M13 Component Bodies Top:
  lines w3: 118.2,467.2 118.7,467.7
M17 Board Outline:
  lines w0.5: 102.36,411.02 614.17,411.02 ; 117.36,426.02 117.36,891.02 600.36,891.02 600.36,426.02 117.36,426.02 ; 232.36,531.02 480.36,531.02 480.36,591.02 480.36,771.02 480.36,781.02 458.36,781.02 232.36,781.02 232.36,601.02 232.36,531.02